# Altium PCB Controller.PcbDoc (part 2 of 3)
Units mm, origin at the board's own origin, x right, y up, seen from the top; angles counter-clockwise.
Board outline 100 x 95 mm, 2 copper layers (Top Layer, Bottom Layer); 164 components, 143 nets, 702 pads, 2108 vias.
Unrouted connection lines stored in the file: 116.
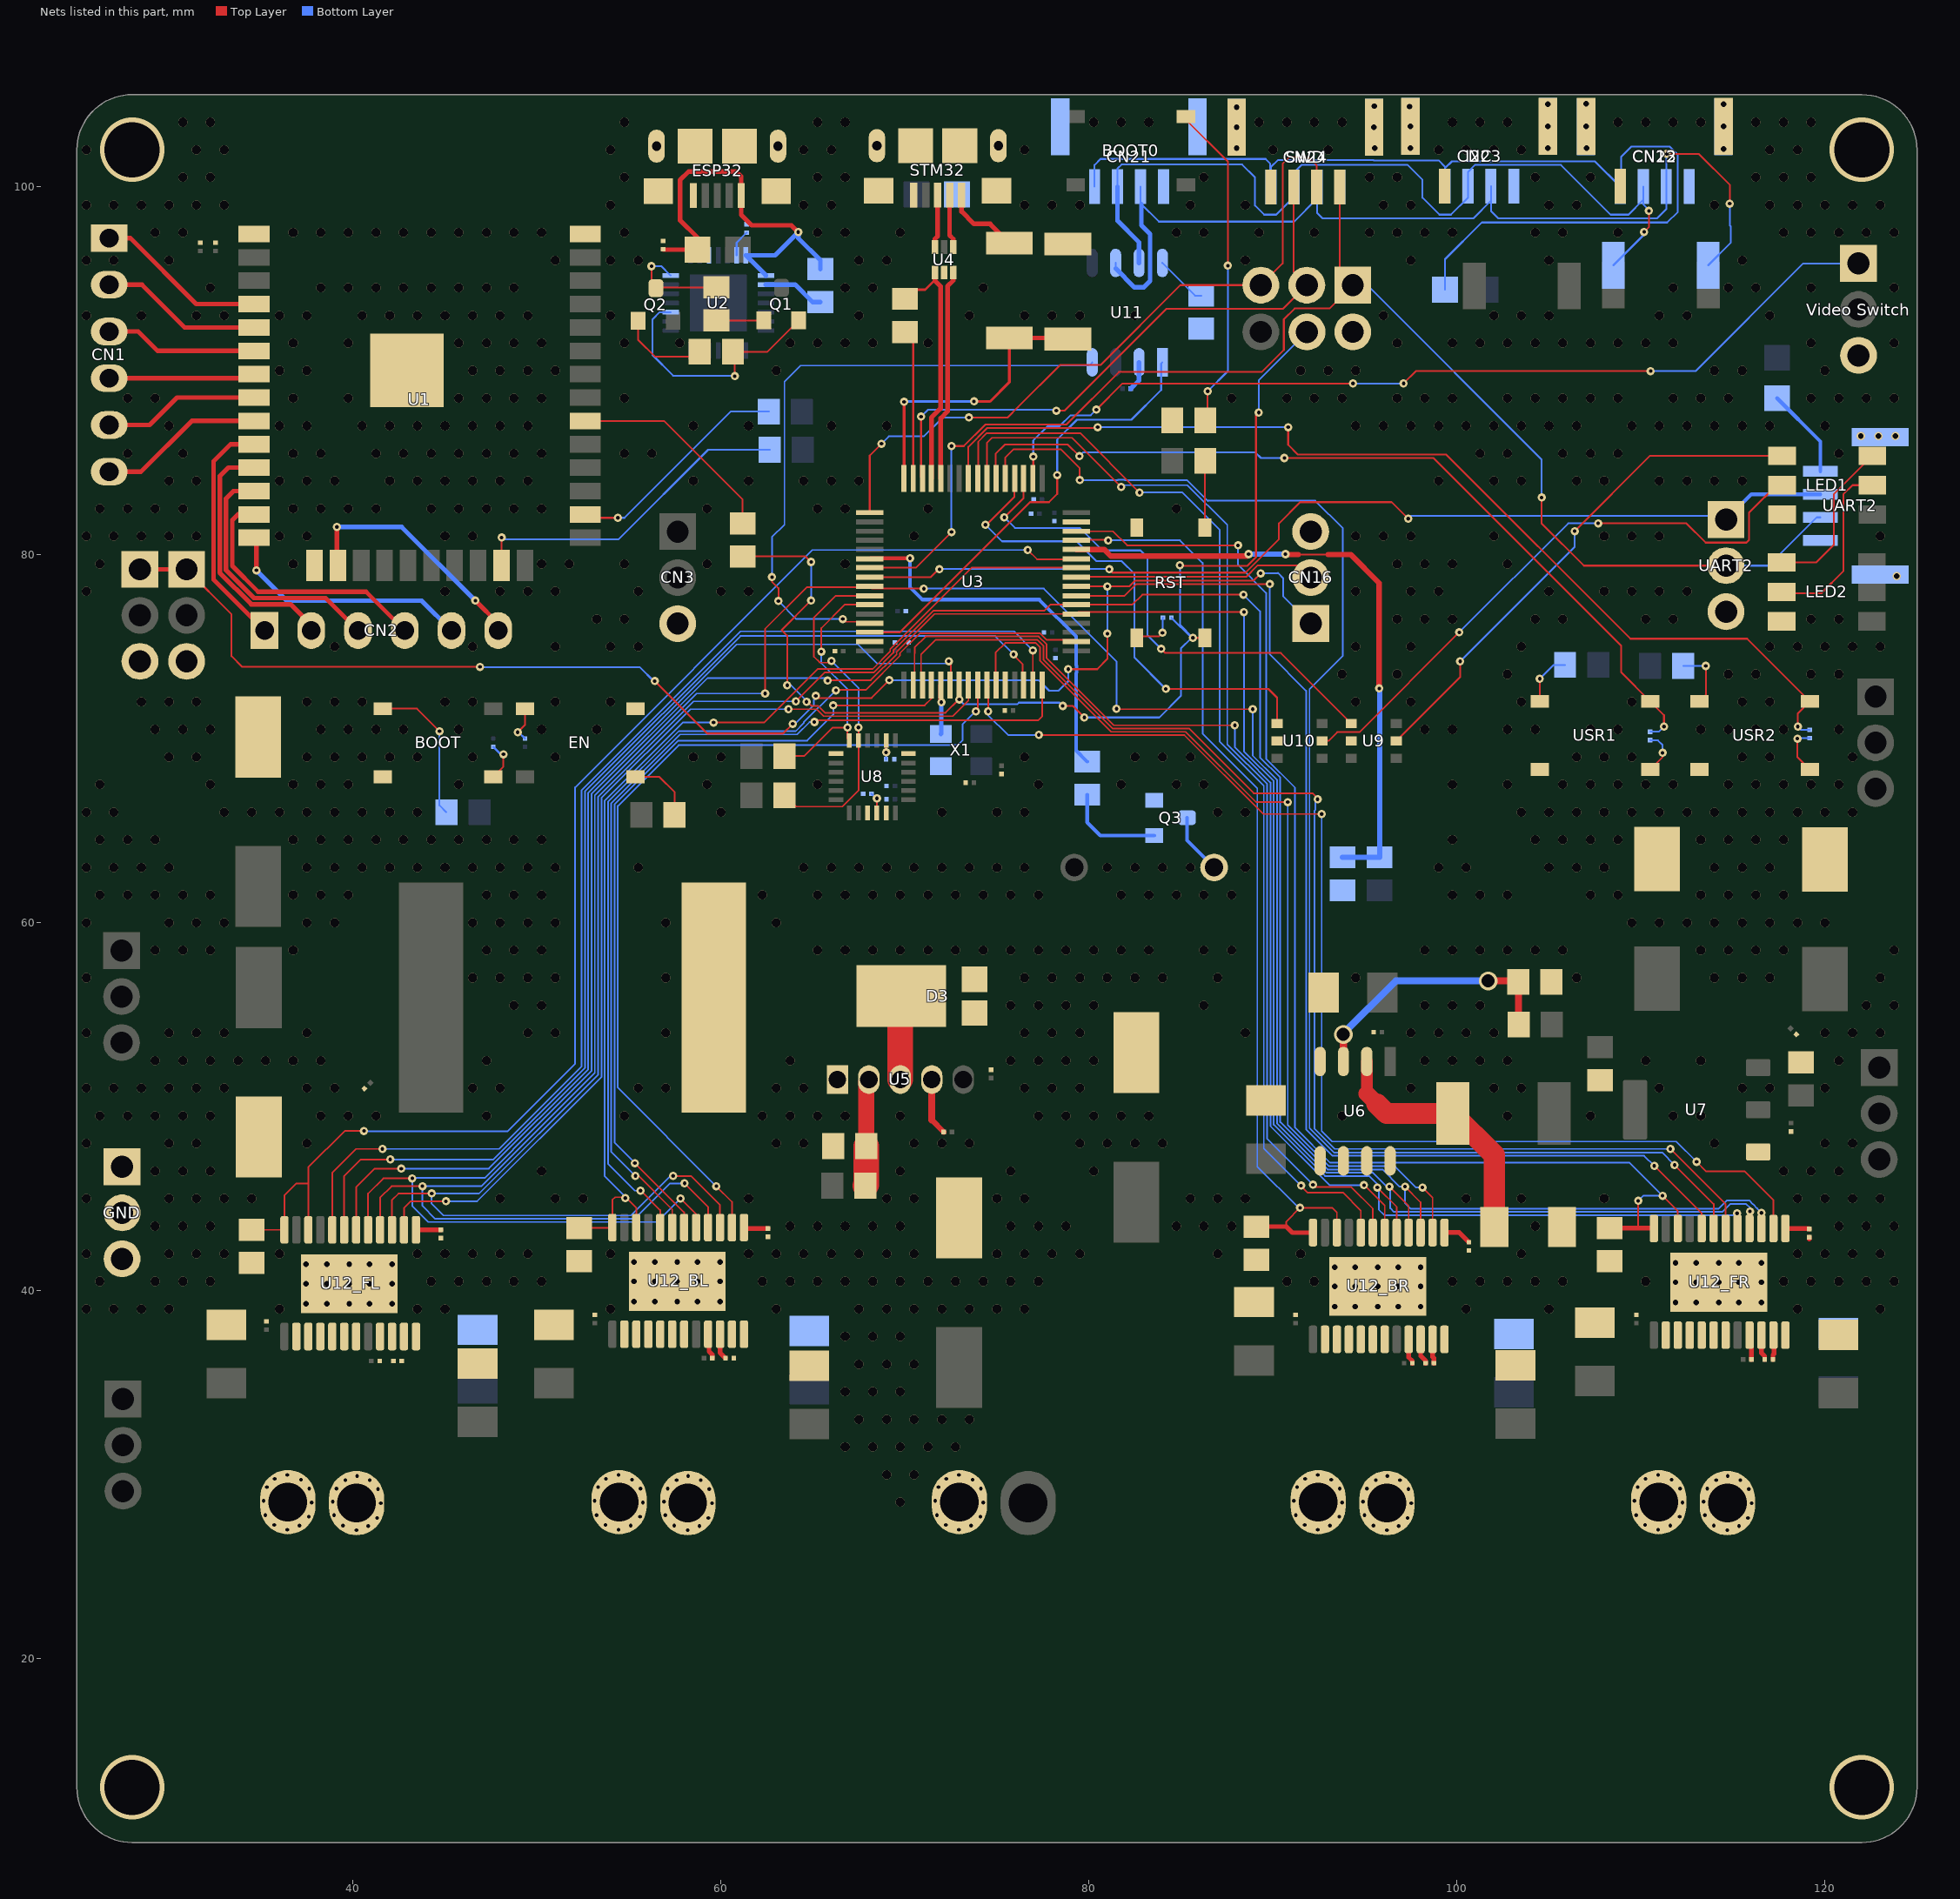
[diagram p2: the nets of this part, all layers, seen from the top]

## Via types
v1: diameter 0.45/0.45 (per signal layer), hole 0.5, Top Layer to Bottom Layer, tented both sides, 1677 vias
v2: diameter 0.45, hole 0.2, Top Layer to Bottom Layer, tented both sides, 209 vias
v3: diameter 0.276, hole 0.2, Top Layer to Bottom Layer, tented both sides, 120 vias
v4: diameter 0.457, hole 0.3, Top Layer to Bottom Layer, tented both sides, 60 vias
v5: diameter 0.457, hole 0.305, Top Layer to Bottom Layer, tented both sides, 22 vias
v6: diameter 0.45, hole 0.203, Top Layer to Bottom Layer, tented both sides, 4 vias
v7: diameter 0.9, hole 0.45, Top Layer to Bottom Layer, tented both sides, 4 vias
v8: diameter 3.5, hole 3, Top Layer to Bottom Layer, 4 vias
v9: diameter 0.5, hole 0.3, Top Layer to Bottom Layer, tented both sides, 3 vias
v10: diameter 1.6, hole 0.8, Top Layer to Bottom Layer, tented both sides, 3 vias
v11: diameter 1.016, hole 0.711, Top Layer to Bottom Layer, tented both sides, 2 vias

## Nets (pads, with @x,y where several pads share a name; then routed paths per layer and width w, separated by ;. In a path a pad name is that pad's centre, name@x,y a point inside that pad or via, vN(x,y) a via of type N, cw(c..) or ccw(c..) an arc to the next point about the centre after c; other vN are vias at no path point) (continued)
GND: "3S INPUT.K" "Video Switch.3" BOOT.3 C1.1 C2.1 C3.1 C4.1 C7.1 C8.1 C9.1 C10.1 C11.1 C12.1 C13.1 C14.1 C15.1 C16.1 C17.1 C18.2 C23.1 C24.2 C25.1 C26.1 C27.1 C28.1 C29.2 C30.2 C31.2 C32.2 C33.1 C34.1 C35.1 C36.1 C37.2 C38.1 C39.1 C40.1 C41.1 C42.1 C43.2 C46.1 C47.1 C48.1 C49.1 CN3.3 CN13.4 CN13.5 CN16.3 CN21.4 CN21.5 CN22.4 CN22.5 CN23.4 CN23.5 CN24.4 CN24.5 D3.1 D3.2 D4.A EN.3 ESP32.5 ESP32.S GND.1 GND.2 GND.3 I2C.4 I2C.5 LED1.3 LED2.3 pad.1@94.34,92.105 pad.3@28.421,74.197 pad.3@30.961,74.197 Q3.2 R9.1 R13.1 R16.2 R19.1 R23.2 R28.1 R29.1 RST.3 STM32.5 STM32.S SWD.4 SWD.5 U1.1 U1.15 U1.38 U2.3 U3.12 U3.31 U3.63 U4.2 U5.1 U6.4 U6.5 U6.6 U6.7 U6.8 U7.1 U8.1 U8.9 U8.11 U8.18 U9.2 U10.2 U11.2 U12_BL.16 U12_BL.17 U12_BL.24 U12_BL.THERM U12_BR.16 U12_BR.17 U12_BR.24 U12_BR.THERM U12_FL.16 U12_FL.17 U12_FL.24 U12_FL.THERM U12_FR.16 U12_FR.17 U12_FR.24 U12_FR.THERM UART2.3@114.625,76.9 UART2.4 UART2.5 USR1.3 USR2.3 X1.2 | length 2.1
  Top Layer w0.089: U4.2@72.125,95.335 U4.2@72.125,95.625
  Top Layer w0.254: R29.1@34.5,41.5 R29.1@34.575,41.425 ; C43.2@119.15,42.8 C43.2@119.15,42.9
  Bottom Layer w0.25: C42.1@82.275,89.025 82.72,89.47 U11.2@82.72,90.45
  other v1: 69.75,28.5 69,30 70.5,30 66.75,31.5 68.25,31.5 69.75,31.5 71.25,31.5 72.75,31.5 67.5,33 69,33 70.5,33 72,33 73.5,33 66.75,34.5 68.25,34.5 69.75,34.5 67.5,36 69,36 70.5,36 66.75,37.5 68.25,37.5 69.75,37.5 25.5,39 27,39 28.5,39 30,39 36,39 43.5,39 45,39 54,39 63,39 67.5,39 69,39 70.5,39 72,39 73.5,39 75,39 76.5,39 100.5,39 105,39 118.5,39 123,39 26.25,40.5 29.25,40.5 30.75,40.5 32.25,40.5 44.25,40.5 45.75,40.5 47.25,40.5 48.75,40.5 50.25,40.5 62.25,40.5 63.75,40.5 65.25,40.5 66.75,40.5 68.25,40.5 69.75,40.5 71.25,40.5 72.75,40.5 74.25,40.5 75.75,40.5 77.25,40.5 90.75,40.5 92.25,40.5 99.75,40.5 101.25,40.5 102.75,40.5 104.25,40.5 105.75,40.5 110.25,40.5 117.75,40.5 119.25,40.5 120.75,40.5 122.25,40.5 123.75,40.5 25.5,42 30,42 31.5,42 33,42 36,42 43.5,42 45,42 46.5,42 48,42 49.5,42 54,42 61.5,42 63,42 64.5,42 66,42 67.5,42 69,42 70.5,42 75,42 76.5,42 78,42 79.5,42 87,42 91.5,42 103.5,42 118.5,42 120,42 121.5,42 123,42 29.25,43.5 30.75,43.5 32.25,43.5 63.75,43.5 65.25,43.5 66.75,43.5 68.25,43.5 69.75,43.5 75.75,43.5 77.25,43.5 78.75,43.5 84.75,43.5 86.25,43.5 87.75,43.5 104.25,43.5 120.75,43.5 122.25,43.5 123.75,43.5 25.5,45 30,45 31.5,45 33,45 34.5,45 48,45 51,45 52.5,45 61.5,45 69,45 70.5,45 75,45 76.5,45 85.5,45 87,45 88.5,45 100.5,45 103.5,45 108,45 118.5,45 120,45 121.5,45 123,45 29.25,46.5 30.75,46.5 32.25,46.5 50.25,46.5 69.75,46.5 75.75,46.5 80.25,46.5 117.75,46.5 119.25,46.5 120.75,46.5 25.5,48 30,48 31.5,48 37.5,48 63,48 64.5,48 70.5,48 72,48 73.5,48 79.5,48 81,48 82.5,48 84,48 114,48 120,48 121.5,48 26.25,49.5 27.75,49.5 29.25,49.5 30.75,49.5 32.25,49.5 38.25,49.5 39.75,49.5 41.25,49.5 47.25,49.5 54.75,49.5 62.25,49.5 63.75,49.5 65.25,49.5 66.75,49.5 69.75,49.5 77.25,49.5 78.75,49.5 80.25,49.5 81.75,49.5 83.25,49.5 93.75,49.5 102.75,49.5 107.25,49.5 111.75,49.5 113.25,49.5 25.5,51 27,51 28.5,51 30,51 31.5,51 33,51 37.5,51 39,51 46.5,51 48,51 55.5,51 57,51 63,51 64.5,51 76.5,51 78,51 79.5,51 97.5,51 102,51 103.5,51 111,51 115.5,51 117,51 120,51 29.25,52.5 30.75,52.5 32.25,52.5 33.75,52.5 35.25,52.5 36.75,52.5 38.25,52.5 47.25,52.5 63.75,52.5 75.75,52.5 77.25,52.5 78.75,52.5 80.25,52.5 98.25,52.5 99.75,52.5 101.25,52.5 102.75,52.5 110.25,52.5 113.25,52.5 120.75,52.5 25.5,54 30,54 31.5,54 33,54 37.5,54 49.5,54 51,54 57,54 76.5,54 78,54 79.5,54 88.5,54 97.5,54 99,54 100.5,54 102,54 120,54 121.5,54 123,54 48.75,55.5 50.25,55.5 75.75,55.5 77.25,55.5 78.75,55.5 80.25,55.5 86.25,55.5 98.25,55.5 99.75,55.5 101.25,55.5 122.25,55.5 123.75,55.5 25.5,57 46.5,57 48,57 49.5,57 51,57 57,57 76.5,57 78,57 79.5,57 81,57 82.5,57 84,57 87,57 94.5,57 106.5,57 114,57 115.5,57 117,57 123,57 29.25,58.5 30.75,58.5 32.25,58.5 36.75,58.5 47.25,58.5 48.75,58.5 50.25,58.5 65.25,58.5 66.75,58.5 68.25,58.5 69.75,58.5 71.25,58.5 72.75,58.5 74.25,58.5 75.75,58.5 77.25,58.5 78.75,58.5 80.25,58.5 81.75,58.5 83.25,58.5 86.25,58.5 87.75,58.5 98.25,58.5 99.75,58.5 101.25,58.5 102.75,58.5 104.25,58.5 105.75,58.5 113.25,58.5 114.75,58.5 116.25,58.5 117.75,58.5 123.75,58.5 25.5,60 30,60 31.5,60 33,60 37.5,60 39,60 46.5,60 48,60 49.5,60 51,60 57,60 63,60 109.5,60 111,60 112.5,60 114,60 115.5,60 117,60 118.5,60 120,60 26.25,61.5 27.75,61.5 29.25,61.5 30.75,61.5 32.25,61.5 36.75,61.5 38.25,61.5 39.75,61.5 47.25,61.5 48.75,61.5 50.25,61.5 62.25,61.5 65.25,61.5 66.75,61.5 68.25,61.5 69.75,61.5 71.25,61.5 72.75,61.5 74.25,61.5 75.75,61.5 77.25,61.5 81.75,61.5 83.25,61.5 84.75,61.5 86.25,61.5 87.75,61.5 99.75,61.5 101.25,61.5 102.75,61.5 107.25,61.5 108.75,61.5 113.25,61.5 114.75,61.5 116.25,61.5 117.75,61.5 25.5,63 27,63 28.5,63 30,63 37.5,63 39,63 40.5,63 42,63 43.5,63 45,63 46.5,63 48,63 49.5,63 51,63 55.5,63 64.5,63 66,63 67.5,63 69,63 70.5,63 72,63 73.5,63 75,63 76.5,63 81,63 82.5,63 84,63 85.5,63 88.5,63 99,63 100.5,63 105,63 106.5,63 108,63 114,63 115.5,63 117,63 26.25,64.5 27.75,64.5 29.25,64.5 36.75,64.5 38.25,64.5 39.75,64.5 41.25,64.5 42.75,64.5 44.25,64.5 45.75,64.5 47.25,64.5 48.75,64.5 50.25,64.5 99.75,64.5 104.25,64.5 105.75,64.5 107.25,64.5 108.75,64.5 113.25,64.5 114.75,64.5 116.25,64.5 117.75,64.5 25.5,66 27,66 33,66 34.5,66 36,66 37.5,66 39,66 40.5,66 42,66 43.5,66 60,66 72,66 75,66 76.5,66 87,66 88.5,66 103.5,66 105,66 106.5,66 108,66 109.5,66 111,66 112.5,66 114,66 115.5,66 117,66 118.5,66 120,66 121.5,66 26.25,67.5 32.25,67.5 36.75,67.5 38.25,67.5 39.75,67.5 45.75,67.5 59.25,67.5 65.25,67.5 77.25,67.5 81.75,67.5 84.75,67.5 86.25,67.5 99.75,67.5 102.75,67.5 105.75,67.5 107.25,67.5 108.75,67.5 110.25,67.5 111.75,67.5 114.75,67.5 116.25,67.5 117.75,67.5 119.25,67.5 120.75,67.5 30,69 31.5,69 37.5,69 39,69 40.5,69 42,69 43.5,69 46.5,69 51,69 58.5,69 60,69 76.5,69 82.5,69 84,69 85.5,69 106.5,69 108,69 109.5,69 115.5,69 117,69 121.5,69 29.25,70.5 30.75,70.5 32.25,70.5 38.25,70.5 39.75,70.5 41.25,70.5 42.75,70.5 45.75,70.5 50.25,70.5 53.25,70.5 98.25,70.5 99.75,70.5 102.75,70.5 104.25,70.5 107.25,70.5 108.75,70.5 113.25,70.5 114.75,70.5 116.25,70.5 117.75,70.5 120.75,70.5 28.5,72 30,72 31.5,72 37.5,72 39,72 40.5,72 45,72 46.5,72 51,72 54,72 94.5,72 97.5,72 103.5,72 109.5,72 115.5,72 117,72 93.75,73.5 96.75,73.5 102.75,73.5 114.75,73.5 116.25,73.5 119.25,73.5 120.75,73.5 39,75 46.5,75 51,75 54,75 55.5,75 94.5,75 97.5,75 103.5,75 117,75 118.5,75 120,75 121.5,75 123,75 53.25,76.5 54.75,76.5 96.75,76.5 98.25,76.5 99.75,76.5 104.25,76.5 105.75,76.5 110.25,76.5 111.75,76.5 119.25,76.5 120.75,76.5 25.5,78 45,78 48,78 49.5,78 51,78 55.5,78 60,78 61.5,78 94.5,78 97.5,78 99,78 105,78 108,78 109.5,78 111,78 112.5,78 26.25,79.5 36.75,79.5 50.25,79.5 51.75,79.5 54.75,79.5 59.25,79.5 66.75,79.5 96.75,79.5 98.25,79.5 99.75,79.5 102.75,79.5 25.5,81 27,81 28.5,81 30,81 31.5,81 36,81 37.5,81 45,81 46.5,81 70.5,81 94.5,81 96,81 97.5,81 102,81 108,81 109.5,81 111,81 123,81 26.25,82.5 27.75,82.5 29.25,82.5 30.75,82.5 36.75,82.5 38.25,82.5 39.75,82.5 41.25,82.5 44.25,82.5 45.75,82.5 47.25,82.5 48.75,82.5 50.25,82.5 59.25,82.5 65.25,82.5 66.75,82.5 71.25,82.5 84.75,82.5 30,84 31.5,84 36,84 37.5,84 39,84 42,84 43.5,84 45,84 46.5,84 48,84 49.5,84 58.5,84 61.5,84 64.5,84 66,84 67.5,84 99,84 102,84 103.5,84 106.5,84 108,84 111,84 112.5,84 114,84 115.5,84 27.75,85.5 30.75,85.5 36.75,85.5 38.25,85.5 41.25,85.5 42.75,85.5 44.25,85.5 45.75,85.5 47.25,85.5 48.75,85.5 50.25,85.5 54.75,85.5 56.25,85.5 101.25,85.5 102.75,85.5 105.75,85.5 107.25,85.5 108.75,85.5 120.75,85.5 30,87 36,87 37.5,87 40.5,87 42,87 43.5,87 45,87 46.5,87 48,87 49.5,87 58.5,87 61.5,87 66,87 69,87 94.5,87 96,87 97.5,87 99,87 100.5,87 102,87 103.5,87 105,87 106.5,87 109.5,87 111,87 112.5,87 114,87 115.5,87 117,87 120,87 27.75,88.5 29.25,88.5 36.75,88.5 39.75,88.5 45.75,88.5 47.25,88.5 48.75,88.5 50.25,88.5 54.75,88.5 87.75,88.5 90.75,88.5 92.25,88.5 93.75,88.5 96.75,88.5 98.25,88.5 99.75,88.5 102.75,88.5 104.25,88.5 105.75,88.5 107.25,88.5 108.75,88.5 111.75,88.5 113.25,88.5 114.75,88.5 119.25,88.5 120.75,88.5 122.25,88.5 123.75,88.5 36,90 37.5,90 46.5,90 48,90 49.5,90 51,90 63,90 91.5,90 93,90 94.5,90 114,90 115.5,90 120,90 36.75,91.5 39.75,91.5 45.75,91.5 47.25,91.5 48.75,91.5 50.25,91.5 54.75,91.5 57.75,91.5 63.75,91.5 65.25,91.5 66.75,91.5 68.25,91.5 71.25,91.5 96.75,91.5 99.75,91.5 101.25,91.5 102.75,91.5 104.25,91.5 105.75,91.5 107.25,91.5 108.75,91.5 110.25,91.5 111.75,91.5 119.25,91.5 123.75,91.5 25.5,93 28.5,93 31.5,93 33,93 36,93 37.5,93 40.5,93 42,93 43.5,93 45,93 46.5,93 48,93 49.5,93 54,93 67.5,93 73.5,93 76.5,93 78,93 79.5,93 82.5,93 96,93 102,93 103.5,93 105,93 111,93 112.5,93 117,93 32.25,94.5 38.25,94.5 39.75,94.5 41.25,94.5 42.75,94.5 44.25,94.5 45.75,94.5 47.25,94.5 48.75,94.5 66.75,94.5 68.25,94.5 74.25,94.5 111.75,94.5 114.75,94.5 116.25,94.5 119.25,94.5 123.75,94.5 25.5,96 27,96 30,96 51,96 54,96 55.5,96 67.5,96 69,96 88.5,96 97.5,96 105,96 115.5,96 29.25,97.5 30.75,97.5 36.75,97.5 38.25,97.5 39.75,97.5 41.25,97.5 42.75,97.5 44.25,97.5 45.75,97.5 47.25,97.5 48.75,97.5 50.25,97.5 54.75,97.5 65.25,97.5 66.75,97.5 69.75,97.5 84.75,97.5 86.25,97.5 89.25,97.5 92.25,97.5 95.25,97.5 96.75,97.5 98.25,97.5 99.75,97.5 104.25,97.5 105.75,97.5 108.75,97.5 117.75,97.5 119.25,97.5 120.75,97.5 122.25,97.5 123.75,97.5 25.5,99 27,99 28.5,99 30,99 31.5,99 33,99 54,99 64.5,99 66,99 76.5,99 78,99 79.5,99 85.5,99 88.5,99 96,99 97.5,99 105,99 106.5,99 114,99 117,99 118.5,99 120,99 121.5,99 123,99 30.75,100.5 32.25,100.5 54.75,100.5 65.25,100.5 66.75,100.5 86.25,100.5 95.25,100.5 96.75,100.5 104.25,100.5 107.25,100.5 116.25,100.5 117.75,100.5 119.25,100.5 25.5,102 31.5,102 33,102 54,102 64.5,102 66,102 76.5,102 90,102 93,102 99,102 100.5,102 102,102 103.5,102 117,102 118.5,102 30.75,103.5 32.25,103.5 54.75,103.5 65.25,103.5 66.75,103.5 80.25,103.5 81.75,103.5 83.25,103.5 89.25,103.5 90.75,103.5 92.25,103.5 93.75,103.5 99.75,103.5 101.25,103.5 102.75,103.5 108.75,103.5 110.25,103.5 111.75,103.5 113.25,103.5 116.25,103.5 117.75,103.5 119.25,103.5
  other v3: 72.935,27.001 73.595,27.23 72.223,27.255 74.103,27.713 71.741,27.789 74.255,28.475 71.639,28.576 74.128,29.237 71.817,29.313 73.671,29.719 72.249,29.77 72.935,29.973
  other v4: 93.35,39.125 94.475,39.125 95.7,39.125 96.8,39.125 98.025,39.125 37.45,39.275 38.575,39.275 39.8,39.275 40.9,39.275 42.125,39.275 111.875,39.35 113,39.35 114.225,39.35 115.325,39.35 116.55,39.35 55.275,39.4 56.4,39.4 57.625,39.4 58.725,39.4 59.95,39.4 93.35,40.225 94.475,40.225 95.7,40.225 96.8,40.225 98.025,40.225 37.45,40.375 38.575,40.375 39.8,40.375 40.9,40.375 42.125,40.375 111.875,40.45 113,40.45 114.225,40.45 115.325,40.45 116.55,40.45 55.275,40.5 56.4,40.5 57.625,40.5 58.725,40.5 59.95,40.5 93.35,41.275 94.475,41.275 95.7,41.275 96.8,41.275 98.025,41.275 37.45,41.425 38.575,41.425 39.8,41.425 40.9,41.425 42.125,41.425 111.875,41.5 113,41.5 114.225,41.5 115.325,41.5 116.55,41.5 55.275,41.55 56.4,41.55 57.625,41.55 58.725,41.55 59.95,41.55
  other v5: 123.9,78.825 121.95,86.45 122.9,86.45 123.825,86.45 114.5,102.05 88.025,102.1 95.525,102.1 97.475,102.1 104.95,102.1 107.05,102.1 88.025,103.225 95.493,103.225 97.471,103.276 104.938,103.276 107.021,103.276 114.488,103.276 88.025,104.325 97.425,104.35 95.5,104.375 104.95,104.475 114.5,104.475 107.025,104.5
  other v8: 28,13 122,13 28,102 122,102
IN_I2C_SCL: R25.1 U3.58 U8.23 | length 19.4
  Top Layer w0.089: R25.1@63.45,67.084 R25.1@63.45,66.925 63.475,66.925 64.1,66.3 66.594,66.3 67.475,67.181 U8.23@67.475,69.895 67.475,70.475 67.6,70.6 v2(67.475,70.6) ; v2(66,74.225) 65.9,74.125 65.375,74.125 65.357,74.143 65.054,74.446 65.054,74.796 65.05,74.8 65.05,76.575 66.238,77.763 U3.58@68.087,77.763
  Bottom Layer w0.089: v2(66,74.225) 67.475,72.75 v2(67.475,70.6)
IN_I2C_SDA: R24.1 U3.59 U8.24 | length 14
  Top Layer w0.089: R24.1@63.45,69.05 64.525,69.05 66.075,70.6 v2(66.875,70.6) 66.875,69.995 U8.24@66.975,69.895 ; v2(65.45,74.725) 65.45,76 66.725,77.275 68.081,77.275 U3.59@68.087,77.28
  Bottom Layer w0.089: v2(65.45,74.725) 65.45,74.1 66.875,72.675 v2(66.875,70.6)
NetC3_2: C3.2 U2.6 | length 1.5
  Bottom Layer w0.1: U2.6@60.85,96.265 60.85,96.95 C3.2@61.4,97.5
NetC5_1: C5.1 EN.4 | length 2
  Top Layer w0.1: v2(48.95,70.35) 49.35,70.75 EN.4@49.35,71.625
  Bottom Layer w0.1: v2(48.95,70.35) 49,70.35 C5.1@49.35,70
NetC6_1: BOOT.4 C6.1 | length 2.2
  Top Layer w0.1: BOOT.4@47.625,67.925 48.175,68.475 v2(48.175,69.15)
  Bottom Layer w0.1: C6.1@47.625,69.55 48.025,69.15 v2(48.175,69.15)
NetC19_1: C19.1 RST.4 | length 2.3
  Top Layer w0.1: RST.4@82.6,75.475 82.677,75.552 83.802,75.552 v2(84,75.75)
  Bottom Layer w0.1: v2(84,75.75) 84,76.55 C19.1@84.025,76.575
NetC20_1: C20.1 USR2.4 | length 2.6
  Top Layer w0.1: v2(118.5,70) 118.5,69 USR2.4@119.175,68.325
  Bottom Layer w0.1: v2(118.5,70) 118.525,70.025 C20.1@119.175,70.025
NetC21_1: C21.1 USR1.4 | length 2.4
  Top Layer w0.1: USR1.4@110.5,68.325 111.175,69 v2(111.175,69.225)
  Bottom Layer w0.1: C21.1@110.5,69.925 110.525,69.9 110.925,69.9 111.175,69.65 v2(111.175,69.225)
NetC22_1: C22.1 U5.4 | length 3.1
  Top Layer w0.305: 71.46,49.265 C22.1@72.1,48.625
  Top Layer w0.381: 71.46,49.265 U5.4@71.46,51.475
NetC40_2: C40.2 U8.20 | length 1
  Top Layer w0.089: v2(68.975,69.25) U8.20@68.975,69.895
  Bottom Layer w0.089: C40.2@68.975,68.875 v2(68.975,69.25)
NetC41_2: C41.2 U8.10 | length 1.2
  Top Layer w0.1: U8.10@68.475,65.955 v2(68.475,66.75)
  Bottom Layer w0.1: C41.2@68.175,67 68.425,66.75 v2(68.475,66.75)
NetC43_BL_1: C43.1@62.55,43.375 U12_BL.1 | length 1.3
  Top Layer w0.254: U12_BL.1@61.25,43.425 61.3,43.375 C43.1@62.55,43.375
NetC43_BR_1: C43.1@100.65,42.625 U12_BR.1 | length 1.5
  Top Layer w0.254: U12_BR.1@99.325,43.15 100.125,43.15 C43.1@100.65,42.625
NetC43_FL_1: C43.1@44.775,43.3 U12_FL.1 | length 1.3
  Top Layer w0.254: U12_FL.1@43.425,43.3 C43.1@44.775,43.3
NetC43_FR_1: C43.1@119.15,43.35 U12_FR.1 | length 1.3
  Top Layer w0.254: U12_FR.1@117.85,43.375 119.125,43.375 C43.1@119.15,43.35
NetC44_BL_1: C44.1@59.525,36.325 U12_BL.21 | length 2
  Top Layer w0.254: U12_BL.21@59.3,37 U12_BL.21@59.3,37.625 59.35,37.575 59.35,36.7 59.525,36.525 C44.1@59.525,36.325
NetC44_BR_1: C44.1@97.575,36.05 U12_BR.21 | length 1.4
  Top Layer w0.254: U12_BR.21@97.375,37.35 97.375,36.375 97.575,36.175 C44.1@97.575,36.05
NetC44_FL_1: C44.1@41.45,36.175 U12_FL.21
NetC44_FR_1: C44.1@116,36.25 U12_FR.21 | length 1.4
  Top Layer w0.254: U12_FR.21@115.9,37.575 116,37.475 C44.1@116,36.25
NetC45_BL_1: C45.1@60.7,36.325 U12_BL.23 | length 0.1
  Top Layer w0.254: U12_BL.23@60.6,37.625 U12_BL.23@60.7,37.525
NetC45_BL_2: C45.2@60.25,36.325 U12_BL.22 | length 1.4
  Top Layer w0.254: U12_BL.22@59.95,37.625 59.95,36.625 C45.2@60.25,36.325
NetC45_BR_1: C45.1@98.75,36.05 U12_BR.23 | length 1.3
  Top Layer w0.254: U12_BR.23@98.675,37.35 98.675,36.4 98.75,36.325 C45.1@98.75,36.05
NetC45_BR_2: C45.2@98.3,36.05 U12_BR.22 | length 1.4
  Top Layer w0.254: U12_BR.22@98.025,37.35 98.025,36.45 98.3,36.175 C45.2@98.3,36.05
NetC45_FL_1: C45.1@42.65,36.175 U12_FL.23
NetC45_FL_2: C45.2@42.2,36.175 U12_FL.22
NetC45_FR_1: C45.1@117.175,36.25 U12_FR.23 | length 1.4
  Top Layer w0.254: C45.1@117.175,36.25 117.175,36.5 117.225,36.55 117.225,37.55 U12_FR.23@117.2,37.575
NetC45_FR_2: C45.2@116.725,36.25 U12_FR.22 | length 1.4
  Top Layer w0.254: U12_FR.22@116.55,37.575 116.55,36.6 116.725,36.425 C45.2@116.725,36.25
NetCN1_1: CN1.1 U1.4 | length 9.4
  Top Layer w0.25: CN1.1@26.75,97.205 27.895,97.205 31.485,93.615 U1.4@34.625,93.615
NetCN1_2: CN1.2 U1.5 | length 8.8
  Top Layer w0.25: CN1.2@26.75,94.665 28.535,94.665 30.855,92.345 U1.5@34.625,92.345
NetCN1_3: CN1.3 U1.6 | length 8.3
  Top Layer w0.25: CN1.3@26.75,92.125 28.325,92.125 29.375,91.075 U1.6@34.625,91.075
NetCN1_4: CN1.4 U1.7 | length 8
  Top Layer w0.25: CN1.4@26.75,89.585 34.405,89.585 U1.7@34.625,89.805
NetCN1_5: CN1.5 U1.8 | length 8.5
  Top Layer w0.25: CN1.5@26.75,87.045 28.945,87.045 30.435,88.535 U1.8@34.625,88.535
NetCN1_6: CN1.6 U1.9 | length 9
  Top Layer w0.25: CN1.6@26.75,84.505 28.48,84.505 31.24,87.265 U1.9@34.625,87.265
NetCN2_1: CN2.1 U1.10 | length 12.9
  Top Layer w0.25: U1.10@34.625,85.995 33.345,85.995 32.425,85.075 32.425,78.645 CN2.1@35.195,75.875
NetCN2_2: CN2.2 U1.11 | length 13.7
  Top Layer w0.25: U1.11@34.625,84.725 33.225,84.725 32.764,84.264 32.764,79.011 34.475,77.3 36.6,77.3 37.735,76.165 CN2.2@37.735,75.875
NetCN2_3: CN2.3 U1.12 | length 14.1
  Top Layer w0.25: U1.12@34.625,83.455 33.505,83.455 33.103,83.053 33.103,79.151 34.615,77.639 38.511,77.639 CN2.3@40.275,75.875
NetCN2_4: CN2.4 U1.13 | length 14.6
  Top Layer w0.25: U1.13@34.625,82.185 33.752,82.185 33.442,81.875 33.442,79.383 34.847,77.978 40.712,77.978 CN2.4@42.815,75.875
NetCN2_5: CN2.5 U1.14 | length 13.8
  Top Layer w0.25: U1.14@34.625,80.915 34.75,80.79 v2(34.75,79.15)
  Bottom Layer w0.25: v2(34.75,79.15) 36.4,77.5 43.73,77.5 CN2.5@45.355,75.875
NetCN2_6: CN2.6 U1.16 | length 13.4
  Top Layer w0.25: v2(39.125,81.5) 39.125,79.47 U1.16@39.18,79.415 ; v2(46.65,77.5) 47.895,76.255 CN2.6@47.895,75.875
  Bottom Layer w0.25: v2(39.125,81.5) 42.65,81.5 v2(46.65,77.5)
NetCN14_1: CN16.1 pad.1@28.421,79.197 pad.1@30.961,79.197 U3.24 | length 79.3
  Top Layer w0.1: pad.1@30.961,79.197 33.4,76.758 33.4,74.475 33.975,73.9 v2(46.9,73.9) ; v2(56.4,73.125) 59.253,70.272 63.372,70.272 v2(63.9,70.8) ; v2@65.125,72.15 65.15,72.175 v2@65.15,72.286 ; v2(65.15,72.325) v2@65.15,72.286 ; v2(69.15,73.175) 68.181,72.206 65.231,72.206 v2@65.15,72.286 ; v2(78.875,73.775) 80.45,73.775 81,74.325 v2(81,75.7) ; U3.24@79.313,78.271 82.187,78.271 82.499,78.583 88.934,78.583 v2(89.329,78.979)
  Top Layer w0.25: pad.1@28.421,79.197 pad.1@30.961,79.197
  Bottom Layer w0.1: v2(46.9,73.9) 46.925,73.875 55.6,73.875 56.35,73.125 v2(56.4,73.125) ; v2(63.9,70.8) 64.021,70.8 65.054,71.833 65.054,72.104 65.15,72.2 v2(65.15,72.325) ; v2(69.15,73.175) 77.264,73.175 77.837,72.602 78.352,72.602 78.875,73.125 v2(78.875,73.775) ; v2(81,75.7) v2(81,78.275) ; v2(89.329,78.979) 90.254,78.979 90.275,79 90.55,78.725 90.55,77.75 CN16.1@92.05,76.25
NetCN16_2: CN16.2 U3.25 | length 13.3
  Top Layer w0.1: U3.25@79.313,78.779 79.332,78.798 88.551,78.798 89.155,79.402 91.398,79.402 CN16.2@92.05,78.75
NetCN18_1: "Video Switch.1" U3.34 | length 50.9
  Top Layer w0.1: U3.34@76.951,84.138 76.975,84.162 v2(76.975,85.325) ; v2(80.4,87.875) 81.825,89.3 v2(94.35,89.3) ; v2(97.1,89.3) 97.775,89.975 v2(110.525,89.975)
  Bottom Layer w0.1: v2(76.975,85.325) 76.975,86.2 77.75,86.975 78.4,86.975 79,87.575 80.1,87.575 v2(80.4,87.875) ; v2(94.35,89.3) v2(97.1,89.3) ; v2(110.525,89.975) 112.975,89.975 118.825,95.825 121.825,95.825
NetCN19_1: D5.K UART2.1@119.75,84.525 | length 4.9
  Bottom Layer w0.2: D5.K@117.4,88.5 119.75,86.15 UART2.1@119.75,84.525
NetCN19_2: U3.56 UART2.1@114.625,81.9 UART2.2@119.75,83.275 | length 55.1
  Top Layer w0.1: U3.56@68.087,78.779 71.404,78.779 71.825,79.2 v2(71.875,79.2) ; v2(81.1,79.2) 81.277,79.023 88.509,79.023 90.325,80.839 90.325,81.7 91.475,82.85 96.45,82.85 v2(97.35,81.95)
  Bottom Layer w0.1: v2(71.875,79.2) 71.9,79.225 81.075,79.225 v2(81.1,79.2) ; v2(97.35,81.95) 97.502,82.102 114.423,82.102 UART2.1@114.625,81.9
  Bottom Layer w0.2: UART2.1@114.625,81.9 116,83.275 UART2.2@119.75,83.275
NetCN21_1: CN21.1 CN22.1 CN23.1 CN24.1 D6.K | length 58
  Bottom Layer w0.1: CN21.1@80.3,100 80.3,101.175 80.625,101.5 89.6,101.5 89.85,101.25 89.85,100.02 CN24.1@89.896,99.974 89.896,101.071 90.275,101.45 95.45,101.45 95.475,101.425 99,101.425 99.35,101.075 99.35,101 ; D6.K@99.35,94.4 99.35,96.05 101.35,98.05 111.425,98.05 112,98.625 112,101.744 111.567,102.177 109.477,102.177 108.925,101.625 108.925,100.05 CN22.1@108.875,100 107.5,101.375 99.725,101.375 99.35,101 ; CN23.1@99.35,100.025 99.35,101
NetCN21_2: CN21.2 CN22.2 CN23.2 CN24.2 R27.2 U11.7 | length 48.5
  Top Layer w0.1: v2(110.175,97.539) 110.43,97.795 v2(110.43,98.68) v2@110.43,98.73
  Bottom Layer w0.1: CN21.2@81.55,100 81.55,100.975 81.775,101.2 88.325,101.2 89.025,100.5 89.025,98.975 89.525,98.475 90.175,98.475 91.146,99.446 CN24.2@91.146,99.974 91.146,100.771 91.55,101.175 97.325,101.175 98.125,100.375 98.125,99.4 99.05,98.475 99.675,98.475 100.6,99.4 CN23.2@100.6,100.025 100.6,100.8 100.975,101.175 105.65,101.175 108.35,98.475 109.325,98.475 CN22.2@110.125,99.275 ; R27.2@108.496,95.725 110.175,97.404 v2(110.175,97.539) ; CN22.2@110.125,100 CN22.2@110.125,99.275 ; v2(110.43,98.68) 110.43,98.745 110.125,99.05 CN22.2@110.125,99.275
  Bottom Layer w0.25: CN21.2@81.55,100 81.55,98.15 82.72,96.98 U11.7@82.72,95.85
NetCN21_3: CN21.3 CN22.3 CN23.3 CN24.3 R27.1 U11.6 | length 53.2
  Top Layer w0.1: v2(111.4,101.775) 113.15,101.775 114.825,100.1 v2(114.825,99.075)
  Bottom Layer w0.1: U11.6@81.45,95.55 U11.6@81.45,95.85 ; CN21.3@82.8,100 82.8,99.1 82.85,99.05 83.8,98.1 91.15,98.1 CN24.3@92.396,99.346 ; CN24.3@92.396,99.974 CN24.3@92.396,99.346 ; CN23.3@101.85,100.025 CN23.3@101.85,99.225 ; v2(111.4,101.775) 111.4,101.8 111.375,101.775 CN22.3@111.375,100 111.375,98.775 110.878,98.278 102.247,98.278 101.85,98.675 CN23.3@101.85,99.225 ; R27.1@113.653,95.725 114.875,96.947 114.875,97.85 114.825,97.9 v2(114.825,99.075) ; CN24.3@92.396,99.346 92.396,98.579 92.7,98.275 100.9,98.275 CN23.3@101.85,99.225
  Bottom Layer w0.25: U11.6@81.45,95.55 82.475,94.525 82.975,94.525 83.325,94.875 83.325,97.425 82.85,97.9 CN21.3@82.85,99.05
NetCN25_A: FL_MOT.A U12_FL.18 U12_FL.19
  other v3: 40.194,26.976 40.829,27.205 39.457,27.23 41.311,27.636 38.975,27.789 41.515,28.449 38.898,28.525 41.362,29.211 39.102,29.237 39.584,29.694 40.905,29.694 40.219,29.922
NetCN25_K: FL_MOT.K U12_FL.14 U12_FL.15
  other v3: 36.435,27.001 37.095,27.23 35.723,27.255 37.603,27.713 35.241,27.789 37.755,28.475 35.139,28.576 37.628,29.237 35.317,29.313 37.171,29.719 35.749,29.77 36.435,29.973
NetCN26_A: FR_MOT.A U12_FR.18 U12_FR.19
  other v3: 114.694,26.976 115.329,27.205 113.957,27.23 115.811,27.636 113.475,27.789 116.015,28.449 113.398,28.525 115.862,29.211 113.602,29.237 114.084,29.694 115.405,29.694 114.719,29.922
NetCN26_K: FR_MOT.K U12_FR.14 U12_FR.15
  other v3: 110.935,27.001 111.595,27.23 110.223,27.255 112.103,27.713 109.741,27.789 112.255,28.475 109.639,28.576 112.128,29.237 109.817,29.313 111.671,29.719 110.249,29.77 110.935,29.973
NetCN27_A: BL_MOT.A U12_BL.18 U12_BL.19
  other v3: 58.194,26.976 58.829,27.205 57.457,27.23 59.311,27.636 56.975,27.789 59.515,28.449 56.898,28.525 59.362,29.211 57.102,29.237 57.584,29.694 58.905,29.694 58.219,29.922
NetCN27_K: BL_MOT.K U12_BL.14 U12_BL.15
  other v3: 54.435,27.001 55.095,27.23 53.723,27.255 55.603,27.713 53.241,27.789 55.755,28.475 53.139,28.576 55.628,29.237 53.317,29.313 55.171,29.719 53.749,29.77 54.435,29.973
NetCN28_A: BR_MOT.A U12_BR.18 U12_BR.19
  other v3: 96.194,26.976 96.829,27.205 95.457,27.23 97.311,27.636 94.975,27.789 97.515,28.449 94.898,28.525 97.362,29.211 95.102,29.237 95.584,29.694 96.905,29.694 96.219,29.922
NetCN28_K: BR_MOT.K U12_BR.14 U12_BR.15
  other v3: 92.435,27.001 93.095,27.23 91.723,27.255 93.603,27.713 91.241,27.789 93.755,28.475 91.139,28.576 93.628,29.237 91.317,29.313 93.171,29.719 91.749,29.77 92.435,29.973
NetD3_3: D3.3 L1.1 U5.3 | length 4.5
  Top Layer w1.397: U5.3@69.75,51.475 69.75,55.962 D3.3@69.793,56.005
NetD4_K: D4.K L2.1 U6.2 | length 14
  Top Layer w0.635: 95.1,50.7 U6.2@95.1,52.45
  Top Layer w0.889: 95.1,50.7 95.65,50.15
  Top Layer w1.143: 95.65,50.15 96.175,49.625 L2.1@99.775,49.625 102.036,47.365 D4.K@102.036,43.45
NetLED1_1: LED1.1 U9.5 | length 28.4
  Top Layer w0.1: U9.5@96.7,69.875 100.175,73.35 v2(100.175,74.2) ; v2(106.4,81.275) 110.5,85.375 LED1.1@117.675,85.375
  Bottom Layer w0.1: v2(100.175,74.2) 106.4,80.425 v2(106.4,81.275)
NetLED1_2: LED1.2 U10.5 | length 32.6
  Top Layer w0.1: U10.5@92.675,69.875 93.025,69.875 93.5,70.35 94.7,70.35 v2(100.125,75.775) ; v2(107.675,81.7) 112.471,81.7 113.521,80.65 115.729,80.65 115.875,80.796 115.875,82.275 117.525,83.925 LED1.2@117.675,83.775
  Bottom Layer w0.1: v2(100.125,75.775) 106.05,81.7 v2(107.675,81.7)
NetLED1_5: LED1.5 LED2.2 | length 9.8
  Top Layer w0.1: LED2.2@117.65,77.975 117.725,77.9 119.8,77.9 121,79.1 121,83.275 121.5,83.775 LED1.5@122.575,83.775
NetLED1_6: LED1.6 LED2.1 | length 8.9
  Top Layer w0.1: LED2.1@117.65,79.575 119.525,79.575 120.475,80.525 120.475,83.275 LED1.6@122.575,85.375
NetLS1_K: LS1.K Q3.3 | length 3.3
  Bottom Layer w0.2: Q3.3@85.325,65.7 85.325,64.475 LS1.K@86.8,63
NetQ1_1: Q1.1 R4.2 | length 2.6
  Top Layer w0.1: R4.2@59.75,92.725 Q1.1@62.325,92.725
NetQ1_2: Q1.2 R7.1 U2.24 | length 13.7
  Top Layer w0.1: v2(60.75,89.7) 60.75,90.925 R7.1@60.65,91.025 62.525,91.025 Q1.2@64.225,92.725
  Bottom Layer w0.1: U2.24@57.26,93.175 56.675,93.175 56.275,92.775 56.275,90.85 57.4,89.725 60.725,89.725 v2(60.75,89.7)
NetQ2_1: Q2.1 R7.2 | length 4.9
  Top Layer w0.1: Q2.1@55.5,92.7 55.5,91.675 56.425,90.75 58.575,90.75 R7.2@58.85,91.025
NetQ2_3: Q2.3 R4.1 U2.28 | length 5.8
  Top Layer w0.1: v2(56.225,95.675) 56.225,94.718 Q2.3@56.465,94.478 56.512,94.525 R4.1@59.75,94.525
  Bottom Layer w0.1: v2(56.225,95.675) 56.76,95.675 U2.28@57.26,95.175
NetQ3_1: Q3.1 R26.1 | length 5.4
  Bottom Layer w0.2: R26.1@79.9,66.95 79.9,65.45 80.615,64.735 Q3.1@83.547,64.735
NetR1_2: R1.2 U2.9 | length 3.4
  Bottom Layer w0.25: U2.9@62.44,94.675 64.025,94.675 64.975,93.725 R1.2@65.4,93.725
NetR2_2: EN.1 R2.2 | length 3.7
  Top Layer w0.1: EN.1@55.35,67.925 56.65,67.925 57.475,67.1 R2.2@57.475,65.85
NetR3_1: R3.1 U1.30 | length 11.6
  Top Layer w0.1: U1.30@52.625,87.265 56.91,87.265 61.175,83 R3.1@61.175,81.7
NetR5_1: R5.1 U1.26 | length 12.4
  Top Layer w0.1: U1.26@52.625,82.185 52.81,82 v2(54.4,82)
  Bottom Layer w0.1: v2(54.4,82) 54.75,82 60.525,87.775 R5.1@62.6,87.775
NetR6_2: BOOT.1 R6.2 | length 8.1
  Top Layer w0.1: BOOT.1@41.625,71.625 43.475,71.625 v2(44.7,70.4)
  Bottom Layer w0.1: v2(44.7,70.4) 44.7,66.375 R6.2@45.075,66
NetR8_1: R8.1 U1.23 | length 18.1
  Top Layer w0.1: U1.23@48.07,79.415 48.075,79.42 v2(48.075,80.925)
  Bottom Layer w0.1: v2(48.075,80.925) 48.177,80.823 54.423,80.823 59.3,85.7 R8.1@62.65,85.7
NetR9_2: BOOT0.3 R9.2 | length 17.9
  Top Layer w0.1: BOOT0.3@85.275,103.8 85.275,103.636 87.55,101.361 v2(87.55,95.7) ; R9.2@86.325,87.3 86.45,87.425 v2(86.45,88.875)
  Bottom Layer w0.1: v2(86.45,88.875) 87.55,89.975 v2(87.55,95.7)
NetR10_1: R10.1 U3.47 | length 8.6
  Top Layer w0.1: R10.1@69.85,92.1 R10.1@70,92.1 70.449,92.1 U3.47@70.449,84.138
NetR11_2: R11.2 RST.1 | length 3.6
  Top Layer w0.1: RST.1@86.3,81.475 86.3,85.075 R11.2@86.325,85.1
NetR14_2: R14.2 USR2.1 | length 3.3
  Top Layer w0.1: USR2.1@113.175,72.025 113.525,72.375 v2(113.525,73.95)
  Bottom Layer w0.1: R14.2@112.3,73.95 v2(113.525,73.95)
NetR15_2: R15.2 USR1.1 | length 2.9
  Top Layer w0.1: USR1.1@104.5,72.025 v2(104.5,73.25)
  Bottom Layer w0.1: v2(104.5,73.25) 105.25,74 R15.2@105.875,74
NetR16_1: R16.1 R17.1 U6.3 | length 14.6
  Top Layer w0.381: v11(93.825,53.925) 93.825,53.725 93.83,53.72 U6.3@93.83,52.45 ; v11(101.7,56.825) 103.275,56.825 R16.1@103.325,56.775 103.35,56.75 R17.1@103.35,54.45
  Bottom Layer w0.381: v11(93.825,53.925) 93.8,53.95 96.675,56.825 v11(101.7,56.825)
NetR18_1: R18.1 R19.2 U5.2 | length 5.9
  Top Layer w0.076: U5.2@67.9,51.335 U5.2@68.04,51.475
  Top Layer w0.889: R19.2@67.9,47.85 U5.2@67.9,51.335
  Top Layer w1.397: R18.1@67.85,45.7 67.9,45.75 R19.2@67.9,47.85
NetR22_1: R22.1 R23.1 U3.28 | length 34.3
  Top Layer w0.1: 91.375,80 93,80
  Top Layer w0.3: U3.28@79.313,80.278 80.837,80.278 81.19,79.925 84.726,79.925 84.728,79.927 85.144,79.927 85.146,79.925 88.575,79.925 v2(88.675,80.025) ; v2(90.675,80.025) 90.7,80 91.375,80 ; 93,80 94.225,80 95.775,78.45 v2(95.775,72.725)
  Bottom Layer w0.3: v2(88.675,80.025) v2(90.675,80.025) ; R23.1@93.775,63.55 R22.1@95.8,63.55 95.8,72.65 95.825,72.675 v2(95.775,72.725)
NetR26_2: R26.2 U3.54 | length 21
  Top Layer w0.2: U3.54@68.087,79.77 68.117,79.8 v2(70.275,79.8)
  Bottom Layer w0.2: v2(70.275,79.8) 70.275,78.225 70.95,77.55 77.3,77.55 79.298,75.552 79.298,73.991 79.327,73.962 79.327,73.588 79.298,73.559 79.298,69.352 R26.2@79.9,68.75
NetR28_2: R28.2 U11.8 | length 2.8
  Bottom Layer w0.1: U11.8@83.99,95.85 85.765,94.075 R28.2@86.1,94.075
NetR29_BL_2: R29.2@52.3,43.4 U3.26 U12_BL.10 U12_BL.12 | length 59.1
  Top Layer w0.089: R29.2@52.3,43.4 54.075,43.4 U12_BL.12@54.05,43.425 ; U12_BL.12@54.1,43.425 54.1,44.925 54.25,45.075 54.75,45.075 v2(54.8,45.025) 54.875,45.025 55.4,44.5 U12_BL.10@55.4,43.425 ; v2(59.6,70.875) 62.35,70.875 65.253,73.778 68.239,73.778 69.195,74.734 69.195,74.86 73.622,79.287 U3.26@79.313,79.287
  Bottom Layer w0.089: v2(54.8,45.025) 54.875,45.025 53.681,46.219 53.681,66.631 57.925,70.875 v2(59.6,70.875)
NetR29_BR_2: R29.2@89.1,43.475 U3.29 U12_BR.10 U12_BR.12 | length 52.4
  Top Layer w0.089: U3.29@79.313,80.786 79.328,80.8 81.025,80.8 v2(81.05,80.775) ; 90.725,43.475 90.725,43.75 v2(91.475,44.5) 93.225,44.5 93.475,44.25 U12_BR.10@93.475,43.15
  Top Layer w0.254: R29.2@89.1,43.475 90.725,43.475 91.054,43.146 92.171,43.146 U12_BR.12@92.175,43.15
  Bottom Layer w0.089: v2(81.05,80.775) 84.95,80.775 86.175,79.55 86.175,70.275 89.15,67.3 89.15,46.739 91.389,44.5 v2(91.475,44.5)
NetR29_FL_2: R29.2@34.5,43.3 U3.27 U12_FL.10 U12_FL.12 | length 73.3
  Top Layer w0.089: R29.2@34.5,43.3 U12_FL.12@36.275,43.3 36.275,45.175 36.925,45.825 37.55,45.825 37.575,45.85 ; U12_FL.10@37.575,43.3 37.575,45.85 ; v2(40.6,48.675) 39.55,48.675 37.575,46.7 37.575,45.85 ; v2(76.675,80.25) 77.175,79.75 79.294,79.75 U3.27@79.313,79.77
  Bottom Layer w0.089: v2(40.6,48.675) 40.625,48.65 48.398,48.65 52.075,52.327 52.075,67.35 64.975,80.25 v2(76.675,80.25)
NetR29_FR_2: R29.2@108.3,43.4 U3.30 U12_FR.10 U12_FR.12 | length 71
  Top Layer w0.089: U3.30@79.313,81.268 81.307,81.268 82.075,80.5 v2(88.1,80.5) ; 109.85,43.4 v2(109.85,44.875) ; v2(111.175,45.15) 112,44.325 U12_FR.10@112,43.375
  Top Layer w0.254: R29.2@108.3,43.4 109.85,43.4 110.675,43.4 U12_FR.12@110.7,43.375
  Bottom Layer w0.089: v2(88.1,80.5) 88.1,79.45 89.631,77.919 89.631,73.816 89.629,73.814 89.629,68.898 91.196,67.33 91.196,48.861 93.108,46.95 109.375,46.95 v2(111.175,45.15) 110.125,45.15 v2(109.85,44.875)
NetU3_2: U3.2 U12_BR.6 | length 54.2
  Top Layer w0.089: U3.2@70.449,72.912 70.521,72.984 70.521,74.639 70.525,74.643 70.525,74.95 71.127,75.552 77.262,75.552 77.702,75.112 77.702,74.374 81.352,70.725 v2(87.925,70.725) ; v2(94.95,45.725) 94.975,45.725 96.075,44.625 U12_BR.6@96.075,43.15
  Bottom Layer w0.089: v2(87.925,70.725) 87.925,69.531 88.531,68.925 88.55,68.925 89.862,67.613 89.862,48.938 93.075,45.725 v2(94.95,45.725)
NetU3_3: U3.3 U12_FR.6 | length 71.1
  Top Layer w0.089: U3.3@70.957,72.912 70.875,72.993 70.875,74.575 71.674,75.374 77.188,75.374 77.524,75.038 77.524,74.301 81.278,70.547 85.428,70.547 88.95,67.025 92.15,67.025 92.45,66.725 v2(92.425,66.7) ; v2(111.6,47.7) 114.6,44.7 U12_FR.6@114.6,43.375
  Bottom Layer w0.089: v2(92.425,66.7) 92.3,66.7 92.3,66.111 92.254,66.064 92.254,48.811 93.364,47.7 v2(111.6,47.7)
NetU3_4: U3.4 U12_BL.6 | length 45.3
  Top Layer w0.089: v2(55.325,46.925) 55.325,46.914 57.636,44.604 57.646,44.604 58,44.25 U12_BL.6@58,43.425 ; v2(66.103,71.804) 71.071,71.804 71.075,71.8 71.475,72.2 71.475,72.876 U3.4@71.439,72.912
  Bottom Layer w0.089: v2(55.325,46.925) 55.35,46.925 54.214,48.06 54.214,66.41 57.69,69.885 64.685,69.885 66.103,71.303 v2(66.103,71.804)
NetU3_6: U3.6 U12_FL.6 | length 57.4
  Top Layer w0.089: U12_FL.6@40.175,43.3 40.175,45.625 41.175,46.625 v2(42.625,46.625) ; v2(72.379,74.204) 72.5,74.082 72.5,72.956 U3.6@72.455,72.912
  Bottom Layer w0.089: v2(42.625,46.625) 47.38,46.625 52.787,52.032 52.787,67.055 60.853,75.121 67.442,75.121 68.485,74.079 72.253,74.079 v2(72.379,74.204)
NetU3_8: U3.8 U12_FL.2 | length 53.3
  Top Layer w0.089: U12_FL.2@42.775,43.3 42.775,44.475 43.15,44.85 v2(45.05,44.85) ; U3.8@73.446,72.912 73.45,72.908 73.45,72.064 72.604,71.218 65.582,71.218 65.2,71.6 v2(63.675,71.6) ; v2(63.675,71.6) 63.668,71.6 63.675,71.593 v2(63.675,71.6)
  Bottom Layer w0.089: v2(45.05,44.85) 46.75,44.85 53.503,51.603 53.503,66.765 58.338,71.6 v2(63.675,71.6)
NetU3_9: U3.9 U12_BL.2 | length 49.1
  Top Layer w0.089: v2(59.75,45.675) 60.6,44.825 U12_BL.2@60.6,43.425 ; v2(73.85,71.475) 73.8,71.475 73.954,71.629 U3.9@73.954,72.912
  Bottom Layer w0.089: v2(59.75,45.675) 54.392,51.033 54.392,66.336 57.703,69.646 71.29,69.646 71.295,69.642 72.867,69.642 73.125,69.9 73.125,70.775 73.825,71.475 v2(73.85,71.475)
NetU3_10: U3.10 U12_FR.2 | length 66.9
  Top Layer w0.089: U3.10@74.462,72.912 74.55,72.824 74.525,72.799 v2(74.525,71.475) ; v2(77.275,70.2) 77.284,70.191 85.182,70.191 89.473,65.9 v2(92.65,65.9) ; v2(113.025,47) 113.55,46.475 115.4,46.475 115.404,46.471 115.639,46.471 117.2,44.911 U12_FR.2@117.2,43.375
  Bottom Layer w0.089: v2(74.525,71.475) 74.525,71.275 75.6,70.2 v2(77.275,70.2) ; v2(92.65,65.9) 92.65,48.666 93.216,48.1 111.925,48.1 v2(113.025,47)
NetU3_11: U3.11 U12_BR.2 | length 50.8
  Top Layer w0.089: U3.11@74.945,72.912 74.925,72.931 74.925,74.671 75.45,75.196 77.114,75.196 77.346,74.964 77.346,74.227 81.204,70.369 85.256,70.369 89.075,66.55 v2(90.8,66.55) ; v2(98.125,45.6) 98.675,45.05 U12_BR.2@98.675,43.15
  Bottom Layer w0.089: v2(90.8,66.55) 90.803,66.547 90.803,49.003 93.048,46.759 96.627,46.759 97.786,45.6 v2(98.125,45.6)
NetU3_14: U3.14 U12_FL.7 | length 62.6
  Top Layer w0.089: U12_FL.7@39.525,43.3 39.525,46.225 40.425,47.125 v2(42.025,47.125) ; v2(75.9,74.575) 75.9,74.525 76.4,74.025 76.4,72.955 U3.14@76.443,72.912
  Bottom Layer w0.089: v2(42.025,47.125) 47.628,47.125 52.609,52.106 52.609,67.129 61.055,75.575 74.9,75.575 v2(75.9,74.575)
NetU3_15: U3.15 U12_FL.8 | length 64.5
  Top Layer w0.089: U12_FL.8@38.875,43.3 38.875,46.4 40.175,47.7 v2(41.6,47.7) ; U3.15@76.951,72.912 76.951,74.799 v2(76.95,74.8)
  Bottom Layer w0.089: v2(41.6,47.7) 47.952,47.7 52.431,52.179 52.431,67.203 61.055,75.827 75.923,75.827 v2(76.95,74.8)
NetU3_16: U3.16 U12_BL.7 | length 51.7
  Top Layer w0.089: v2(55.353,46.227) 55.523,46.227 57.35,44.4 U12_BL.7@57.35,43.425 ; v2(65.075,70.9) 65.121,70.854 65.264,70.996 77.246,70.996 77.459,71.209 U3.16@77.459,72.912
  Bottom Layer w0.089: v2(55.353,46.227) 55.35,46.225 54.037,47.538 54.037,66.483 57.779,70.226 64.138,70.226 64.812,70.9 v2(65.075,70.9)
NetU3_18: U3.18 U12_BL.8 | length 54.1
  Top Layer w0.089: v2(55.628,45.427) 55.628,45.447 56.7,44.375 U12_BL.8@56.7,43.425 ; v2(66.25,72.625) 66.272,72.647 67.862,72.647 69.729,74.513 69.729,74.639 70.819,75.73 77.335,75.73 77.691,75.374 79.213,75.374 U3.18@79.313,75.274
  Bottom Layer w0.089: v2(55.628,45.427) 55.322,45.427 53.859,46.891 53.859,66.557 57.705,70.404 64.064,70.404 64.5,70.839 64.5,70.886 66.239,72.625 v2(66.25,72.625)
NetU3_23: U3.23 U12_FR.8 | length 65.4
  Top Layer w0.089: U3.23@79.313,77.763 81.938,77.763 82.575,78.4 v2(89.825,78.4) ; v2(110.725,46.775) 113.3,44.2 U12_FR.8@113.3,43.375
  Bottom Layer w0.089: v2(89.825,78.4) 89.825,74.575 91.806,72.594 91.806,48.756 93.236,47.325 110.175,47.325 v2(110.725,46.775)
NetU3_35: U3.35 U9.1 | length 28.5
  Top Layer w0.1: v2(75.4,82.025) 76.443,83.068 U3.35@76.443,84.138 ; v2(83.925,74.875) 84.15,74.65 90.425,74.65 U9.1@94.25,70.825
  Bottom Layer w0.1: v2(75.4,82.025) 75.975,81.45 79.5,81.45 80.725,80.225 82.8,80.225 83.175,79.85 83.175,75.625 v2(83.925,74.875)
NetU3_36: U3.36 U10.1 | length 27
  Top Layer w0.1: v2(74.375,81.625) 74.431,81.625 75.95,83.144 75.95,84.128 U3.36@75.961,84.138 ; v2(84.175,72.7) 89.75,72.7 90.225,72.225 U10.1@90.225,70.825
  Bottom Layer w0.1: v2(74.375,81.625) 75.275,80.725 79.325,80.725 80.4,79.65 81.775,79.65 82.477,78.948 82.477,74.398 v2(84.175,72.7)
NetU3_37: U3.37 U12_FR.7 | length 80.2
  Top Layer w0.089: U3.37@75.453,84.138 75.45,84.141 75.45,85.275 75.896,85.721 78.479,85.721 79.5,84.7 v2(79.5,84.05) ; v2(111.825,46.825) 113.95,44.7 U12_FR.7@113.95,43.375
  Bottom Layer w0.089: v2(79.5,84.05) 81.564,84.05 81.586,84.071 81.914,84.071 81.936,84.05 85.327,84.05 86.463,82.913 ; 86.5,82.95 86.525,82.925 92.3,82.925 93.8,81.425 93.8,74.508 91.983,72.692 91.983,48.829 93.31,47.503 111.147,47.503 v2(111.825,46.825)
NetU3_39: U3.39 U12_BR.7 | length 60.3
  Top Layer w0.089: U3.39@74.462,84.138 74.462,86.087 74.725,86.35 79.075,86.35 v2(81.75,83.675) ; v2(92.175,45.75) 92.175,45.625 94.25,45.625 95.425,44.45 U12_BR.7@95.425,43.15
  Bottom Layer w0.089: v2(81.75,83.675) 81.65,83.775 85.35,83.775 87.515,81.61 87.515,69.69 89.684,67.521 89.684,48.241 v2(92.175,45.75)
NetU3_40: U3.40 U12_BR.8 | length 60
  Top Layer w0.089: U3.40@73.954,84.138 73.975,84.159 73.975,86.125 74.45,86.6 79.525,86.6 v2(82.75,83.375) ; v2(91.529,45.702) 91.529,45.671 91.875,45.325 93.8,45.325 94.775,44.35 U12_BR.8@94.775,43.15
  Bottom Layer w0.089: v2(82.75,83.375) 85.075,83.375 87.1,81.35 87.1,69.853 89.506,67.447 89.506,47.717 91.525,45.698 v2(91.529,45.702)
NetU3_61: U3.61 U11.4 | length 35
  Top Layer w0.089: v2(62.775,78.775) 62.775,78.525 63.125,78.175 v2(63.125,77.475) ; v2(66.625,76.5) 66.775,76.35 68.001,76.35 U3.61@68.087,76.264
  Bottom Layer w0.089: v2(62.775,78.775) 62.775,80.95 63.45,81.625 63.45,89.4 64.325,90.275 80.005,90.275 U11.4@80.18,90.45 ; v2(63.125,77.475) 64.1,76.5 v2(66.625,76.5)
NetU3_62: U3.62 U11.1 | length 24.5
  Top Layer w0.1: U3.62@68.087,75.782 69.725,75.782 76.794,82.85 77.825,82.85 78.275,83.3 v2(78.275,84.325)
  Bottom Layer w0.1: v2(78.275,84.325) 78.275,86.25 79.352,87.327 82.302,87.327 83.925,88.95 83.925,90.385 U11.1@83.99,90.45
NO_ESD_N: STM32.2 U4.4 | length 2.9
  Top Layer w0.254: STM32.2@72.425,99.55 72.425,97.353 72.625,97.153 U4.4@72.625,96.715
NO_ESD_P: STM32.3 U4.6 | length 2.9
  Top Layer w0.254: U4.6@71.625,96.715 71.625,97.153 71.775,97.303 STM32.3@71.775,99.55
nRST: C19.2 pad.2@91.85,92.1 R3.2 RST.2 U3.7 | length 63.3
  Top Layer w0.1: R3.2@61.175,79.9 64.6,79.9 v2(64.9,79.6) ; v2(63.6,72.9) 63.6,75.6 63.3,75.9 v2(64.9,77.5) ; v2(64.652,72) 64.7,72 64.917,71.783 65.276,71.783 65.658,71.402 72.202,71.402 72.929,72.129 v2(72.954,72.129) ; v2@72.938,72.138 72.944,72.138 v2(72.954,72.129) ; U3.7@72.938,72.912 72.954,72.896 v2(72.954,72.129) ; v2(78.575,71.775) 79.125,71.775 v2(79.75,71.15) ; v2(84.936,79.425) 84.9,79.389 88.608,79.389 89.077,79.858 89.077,87.577 v2(89.225,87.725) ; v2(85.65,75.475) RST.2@86.3,75.475
  Bottom Layer w0.1: v2(63.6,72.9) 63.8,72.9 64.7,72 v2(64.652,72) ; v2(64.9,77.5) v2(64.9,79.6) ; v2(72.954,72.129) 72.929,72.129 72.925,72.125 73.177,71.873 73.679,71.873 73.683,71.877 74.017,71.877 74.021,71.873 74.354,71.873 74.358,71.877 74.692,71.877 74.696,71.873 76.117,71.873 76.196,71.952 78.398,71.952 v2(78.575,71.775) ; v2(79.75,71.15) 83.825,71.15 85,72.325 85,74.9 v2@85.575,75.475 ; C19.2@84.475,76.575 v2@85.575,75.475 ; v2(84.936,79.425) 84.95,79.425 84.95,76.175 v2(85.65,75.475) v2@85.575,75.475 ; v2(89.225,87.725) 89.225,89.475 pad.2@91.85,92.1
RCC_OSC_IN: U3.5 X1.3 | length 2.7
  Top Layer w0.254: U3.5@71.947,72.912 71.947,72.003 v6(71.975,71.975)
  Bottom Layer w0.254: X1.3@71.95,70.25 71.975,70.275 v6(71.975,71.975)
SPI_MISO: U3.22 U12_BL.3 U12_BR.3 U12_FL.3 U12_FR.3 | length 152
  Top Layer w0.089: U12_FL.3@42.125,43.3 42.125,44.925 42.475,45.275 v2(44.275,45.275) ; v2(57.403,46.227) 58.373,46.227 59.95,44.65 U12_BL.3@59.95,43.425 ; v2(64.075,72.025) 65.65,73.6 68.312,73.6 69.373,74.66 69.373,74.787 71.536,76.95 77.575,76.95 77.9,77.275 82.35,77.275 82.9,77.825 v2(88.4,77.825) ; v2(97.175,45.65) 98.025,44.8 U12_BR.3@98.025,43.15 ; U12_FR.3@116.55,43.375 v2(116.55,44.225)
  Bottom Layer w0.089: v2(57.403,46.227) 57.263,46.227 55.116,44.081 44.919,44.081 44.275,44.725 v2(44.275,45.275) 46.85,45.275 53.325,51.75 53.325,66.839 58.511,72.025 v2(64.075,72.025) ; v2(88.4,77.825) 89.3,76.925 89.3,68.975 90.395,67.88 90.395,49.159 92.974,46.581 95.955,46.581 96.886,45.65 v2(97.175,45.65) 97.175,44.75 97.469,44.456 114.231,44.456 114.675,44.9 115.875,44.9 116.079,44.696 116.089,44.696 116.321,44.464 116.321,44.454 v2(116.55,44.225)
SPI_MOSI: U3.57 U12_BL.4 U12_BR.4 U12_FL.4 U12_FR.4 | length 153.3
  Top Layer w0.089: U12_FL.4@41.475,43.3 41.475,45.05 42.1,45.675 v2(43.775,45.675) ; v2(58.025,45.825) 59.3,44.55 U12_BL.4@59.3,43.425 ; v2(62.4,72.45) 62.4,75.961 64.664,78.225 68.041,78.225 U3.57@68.087,78.271 68.208,78.15 v2(71.025,78.15) ; v2(81.5,71.625) 81.525,71.6 v2(88.9,71.6) ; v2(96.325,45.65) 97.375,44.6 U12_BR.4@97.375,43.15 ; U12_FR.4@115.9,43.375 115.925,43.4 v2(115.925,44.3)
  Bottom Layer w0.089: v2(58.025,45.825) 57.225,45.825 55.303,43.903 44.472,43.903 43.775,44.6 v2(43.775,45.675) 46.977,45.675 53.142,51.841 53.142,66.908 58.685,72.45 v2(62.4,72.45) v2@62.5,72.45 ; v2(71.025,78.15) 77.55,78.15 81.5,74.2 v2(81.5,71.625) ; v2(88.9,71.6) 88.9,69.078 90.217,67.761 90.217,49.086 92.9,46.403 95.433,46.403 96.186,45.65 v2(96.325,45.65) 96.375,45.6 96.375,44.475 96.572,44.278 114.428,44.278 114.85,44.7 115.722,44.7 115.925,44.497 v2(115.925,44.3)
SPI_SCLK: U3.21 U12_BL.5 U12_BR.5 U12_FL.5 U12_FR.5 | length 151.3
  Top Layer w0.089: U12_FL.5@40.825,43.3 40.825,45.275 41.65,46.1 v2(43.225,46.1) ; v2(57.8,45) 58.65,44.15 U12_BL.5@58.65,43.425 ; v2(65.8,73.15) 65.825,73.175 68.139,73.175 69.551,74.587 69.551,74.713 71.61,76.772 U3.21@79.313,76.772 79.416,76.875 v2(88.425,76.875) ; v2(95.675,45.6) 96.725,44.55 U12_BR.5@96.725,43.15 ; v2(115.225,44.2) 115.225,43.4 U12_FR.5@115.25,43.375
  Bottom Layer w0.089: v2(57.8,45) 56.525,43.725 44.1,43.725 43.225,44.6 v2(43.225,46.1) 43.25,46.125 47.175,46.125 48.7,47.65 48.7,47.675 52.964,51.939 52.964,66.982 59.279,73.296 65.771,73.296 v2@65.909,73.159 ; v2(65.8,73.15) 65.9,73.15 v2@65.909,73.159 ; v2(88.425,76.875) 88.425,69.3 88.622,69.103 88.624,69.103 90.039,67.687 90.039,49.012 92.827,46.225 95.225,46.225 95.675,45.775 v2(95.675,45.6) 95.75,45.525 95.75,44.4 96.05,44.1 115.125,44.1 v2(115.225,44.2) ; v2@65.909,73.159 v2@65.912,73.163 ; v2@65.912,73.163 65.95,73.2 65.95,73.125 v2@65.912,73.163
SWCLK: pad.3@89.34,94.645 SWD.2 U3.49 | length 38.6
  Top Layer w0.1: U3.49@68.087,82.284 68.087,85.387 v2(68.725,86.025) ; v2(73.475,87.45) 75.575,87.45 76.15,88.025 78.425,90.3 80.625,90.3 84.97,94.645 pad.3@89.34,94.645 90.525,95.83 90.525,101.25 90.875,101.6 91.925,101.6 92.379,101.146 SWD.2@92.379,99.974
  Bottom Layer w0.1: v2(68.725,86.025) 69.125,86.425 71.025,86.425 72.05,87.45 v2(73.475,87.45)
SWDIO: pad.2@91.84,94.645 SWD.3 U3.46 | length 33
  Top Layer w0.1: v2(70.875,87.5) 70.875,84.22 U3.46@70.957,84.138 ; v2(78.225,87.825) 78.675,87.825 84.205,93.355 90.55,93.355 pad.2@91.84,94.645 91.129,95.356 SWD.3@91.129,99.974
  Bottom Layer w0.1: v2(70.875,87.5) 71.252,87.877 78.173,87.877 v2(78.225,87.825)
SWO: pad.1@94.34,94.645 SWD.1 U3.55 UART2.2@114.625,79.4 UART2.3@119.75,82.025 | length 77
  Top Layer w0.1: U3.55@68.087,79.287 70.587,79.287 v2(72.525,81.225) ; v2(72.525,85.9) 73.2,85.9 74.373,87.073 78.773,87.073 81.625,89.925 89.393,89.925 90.59,91.122 90.59,92.79 91.175,93.375 93.07,93.375 pad.1@94.34,94.645 93.629,95.356 SWD.1@93.629,99.974 ; v2(104.6,83.1) 104.6,81.7 106.9,79.4 UART2.2@114.625,79.4
  Bottom Layer w0.1: v2@72.525,81.05 v2(72.525,81.225) v2(72.525,85.9) ; pad.1@94.34,94.645 95.13,94.645 104.6,85.175 v2(104.6,83.1) ; UART2.2@114.625,79.4 116.928,79.4 119.553,82.025 UART2.3@119.75,82.025
USB_DETECT: R12.1 R13.2 U3.48 | length 15.9
  Top Layer w0.15: U3.48@69.941,84.138 69.95,84.148 v2(69.95,88.3) ; v2(73.75,88.325) 74.625,88.325 75.675,89.375 R12.1@75.675,91.772
  Top Layer w0.254: R12.1@75.675,91.772 78.8,91.772 R13.2@78.85,91.721
  Bottom Layer w0.15: v2(69.95,88.3) 69.975,88.325 v2(73.75,88.325)
USB_N: U3.44 U4.3 | length 11.5
  Top Layer w0.127: 71.944,84.941 71.947,84.938
  Top Layer w0.254: 71.944,84.941 71.944,87.406 72.315,87.777 72.315,94.587 72.625,94.897 U4.3@72.625,95.335 ; U3.44@71.947,84.138 71.947,84.938
USB_P: R10.2 U3.45 U4.1 | length 13.7
  Top Layer w0.127: R10.2@69.85,93.9 70.35,94.4 71.1,94.4 71.625,94.925
  Top Layer w0.254: U3.45@71.439,84.138 71.439,87.439 71.934,87.935 71.934,94.587 71.625,94.897 ; 71.625,94.925 U4.1@71.625,95.335
USR_BTN1: C21.2 U3.38 USR1.2 | length 46.5
  Top Layer w0.1: U3.38@74.945,84.138 74.925,84.158 74.925,85.475 75.425,85.975 78.85,85.975 v2(79.475,85.35) ; v2(90.625,85.25) 90.627,85.252 98.723,85.252 108.925,75.05 108.925,73.6 USR1.2@110.5,72.025 111.25,71.275 v2(111.25,70.65)
  Bottom Layer w0.1: v2(79.475,85.35) 79.675,85.55 89.05,85.55 89.35,85.25 v2(90.625,85.25) ; C21.2@110.5,70.375 110.975,70.375 v2(111.25,70.65)
USR_BTN2: C20.2 U3.41 USR2.2 | length 57
  Top Layer w0.1: U3.41@73.446,84.138 73.446,85.855 74.475,86.884 80.434,86.884 v2(80.475,86.925) ; v2(90.825,86.925) 90.825,85.963 91.347,85.441 99.409,85.441 109.425,75.425 115.775,75.425 USR2.2@119.175,72.025 118.525,71.375 v2(118.525,70.65)
  Bottom Layer w0.1: v2(80.475,86.925) v2(90.825,86.925) ; v2(118.525,70.65) 118.7,70.475 C20.2@119.175,70.475
VBUS_ESP: C4.2 D1.A ESP32.1 R1.1 U2.7 U2.8 | length 22.7
  Top Layer w0.254: C4.2@56.85,96.6 56.875,96.575 D1.A@58.725,96.575 58.725,97.225 57.775,98.175 57.775,100.35 58.25,100.825 60.825,100.825 61.1,100.55 ESP32.1@61.1,99.525 61.1,98.475 61.675,97.9 63.825,97.9 v6(64.2,97.525)
  Bottom Layer w0.254: U2.8@62.44,95.175 U2.7@61.35,96.265 62.94,96.265 v6(64.2,97.525) 64.2,97.2 65.4,96 R1.1@65.4,95.525
VBUS_STM: D2.A R12.2 STM32.1 | length 4.2
  Top Layer w0.254: STM32.1@73.075,99.55 73.075,98.65 73.75,97.975 74.628,97.975 R12.2@75.675,96.929
pads on no net: BOOT0.2 ESP32.4 LED2.5 LED2.6 STM32.4 U1.17 U1.18 U1.19 U1.20 U1.21 U1.22 U1.24 U1.29 U1.31 U1.32 U1.33 U1.36 U1.37 U2.1 U2.2 U2.10 U2.11 U2.12 U2.13 U2.14 U2.15 U2.16 U2.17 U2.18 U2.19 U2.20 U2.21 U2.22 U2.23 U2.27 U2.29 U7.4 U8.2 U8.3 U8.4 U8.5 U8.6 U8.7 U8.12 U8.14 U8.15 U8.16 U8.17 U8.19 U8.21 U8.22 U11.5

## Polygon pours and split planes (outlines as drawn)
GND on Bottom Layer "GND_L02_P012" (solid, pour order 12): 25,105 25,26.275 125,26.275 125,105
12V on Bottom Layer "12V_L02_P010" (solid, pour order 10): 25,26.275 25,10 125,10 125,26.275 90.525,26.275 90.525,30.475 74.875,30.475 74.875,30.125 74.875,26.275
12V on Bottom Layer "12V_L02_P002" (solid, pour order 2): 25.2,37.3
GND on Top Layer "GND_L01_P020" (solid, pour order 20): 25,105 125,105 125,38.3 124.975,38.325 74.625,38.325 74.7,38.25 74.7,26.475 70.725,26.475 63.171,34.029 63.171,38.304 25.204,38.304
12V on Top Layer "12V_L01_P018" (solid, pour order 18): 25.204,38.304 25,38.1 25,10 125,10 124.796,10.204 124.796,38.304 124.775,38.325 74.625,38.325 74.7,38.25 74.7,26.475 70.725,26.475 63.171,34.029 63.171,38.304
12V on Top Layer "12V_L01_P016" (solid, pour order 16): 81.35,43.05 72.825,34.525 72.825,33.725 92.35,33.884 92.35,35.175 83.8,43.05
12V on Top Layer "12V_L01_P008" (solid, pour order 8): 26,26